# Altium PCB nf10_addon.PcbDoc
Units mm, origin at the board's own origin, x right, y up, seen from the top; angles counter-clockwise.
Board outline 53.47 x 43.69 mm, 2 copper layers (Top Layer, Bottom Layer); 22 components, 36 nets, 127 pads, 24 vias.
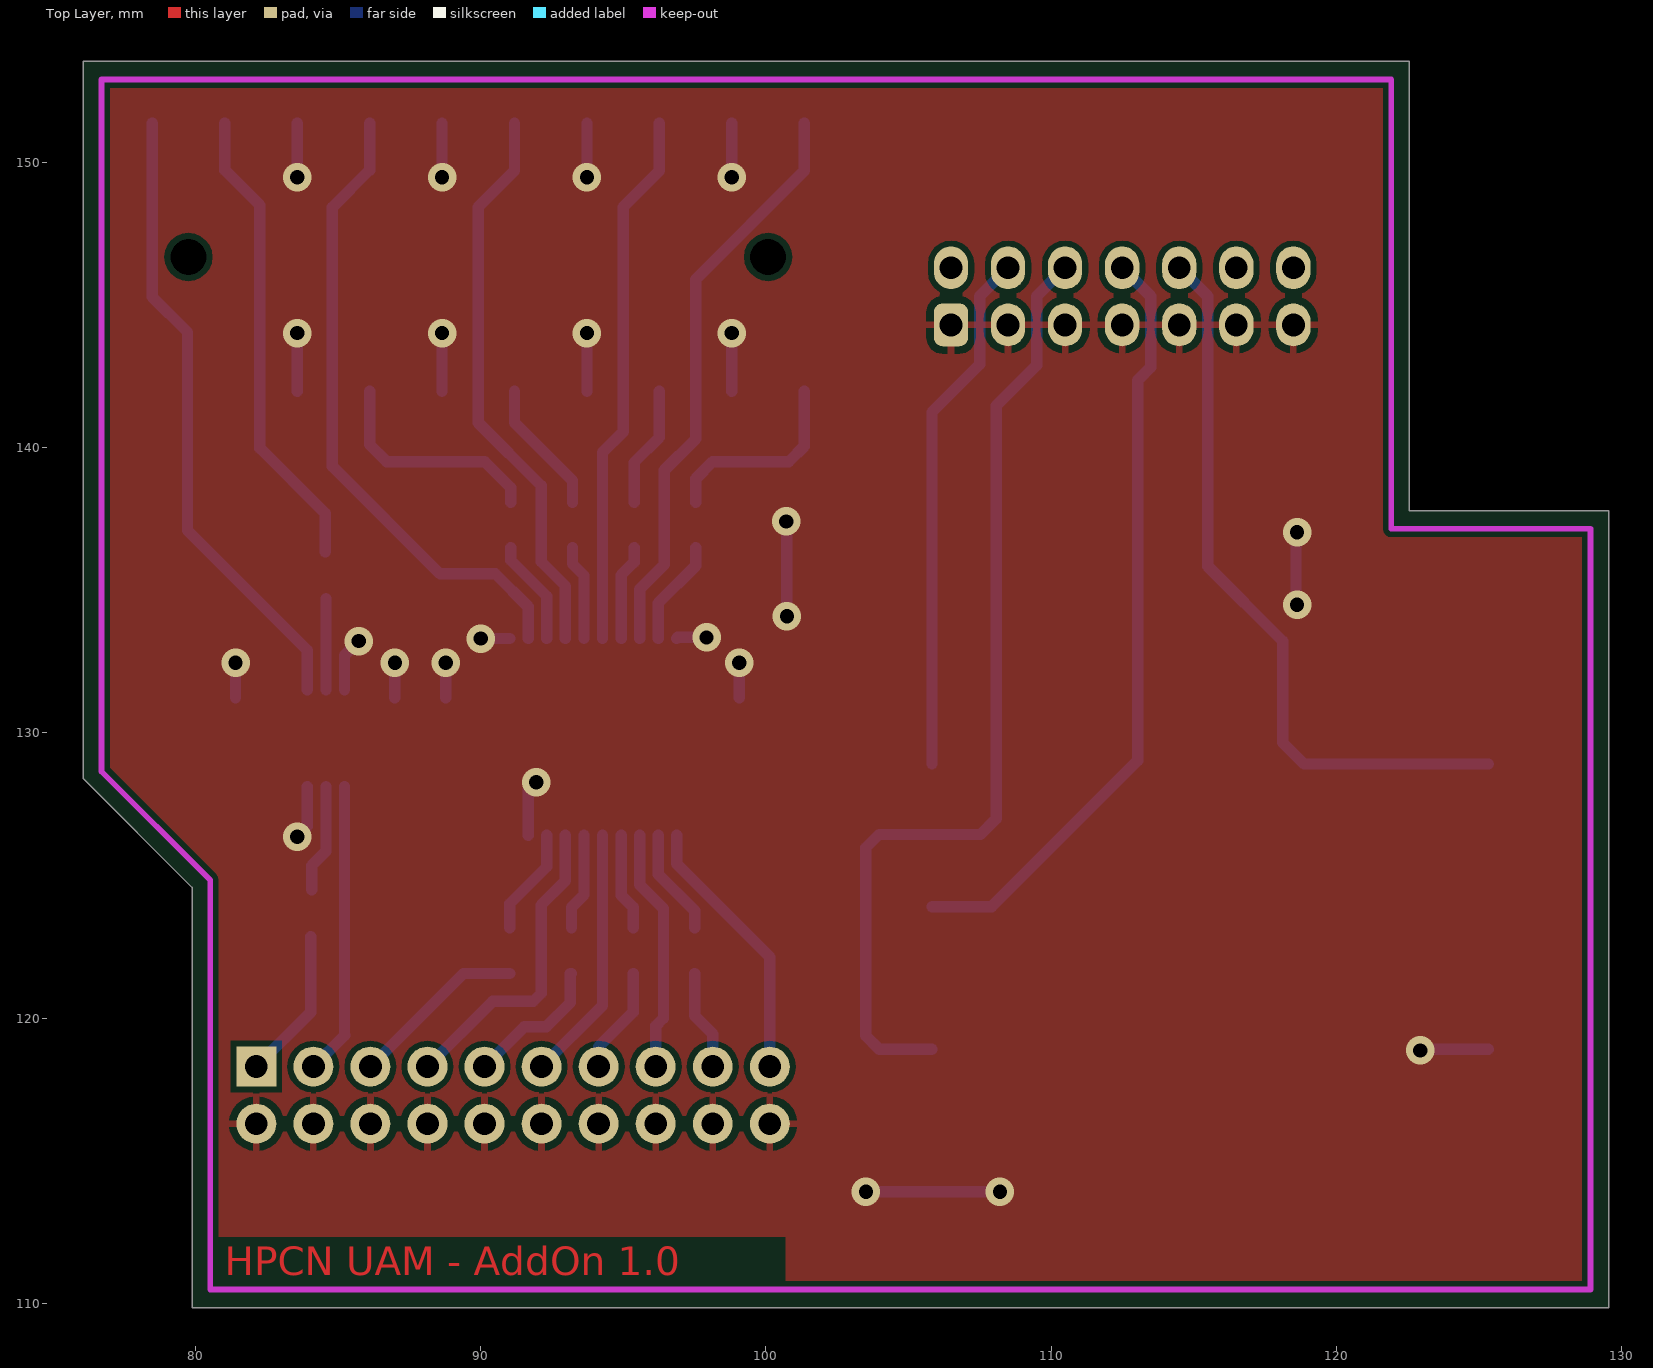
[diagram p0: Top Layer view]
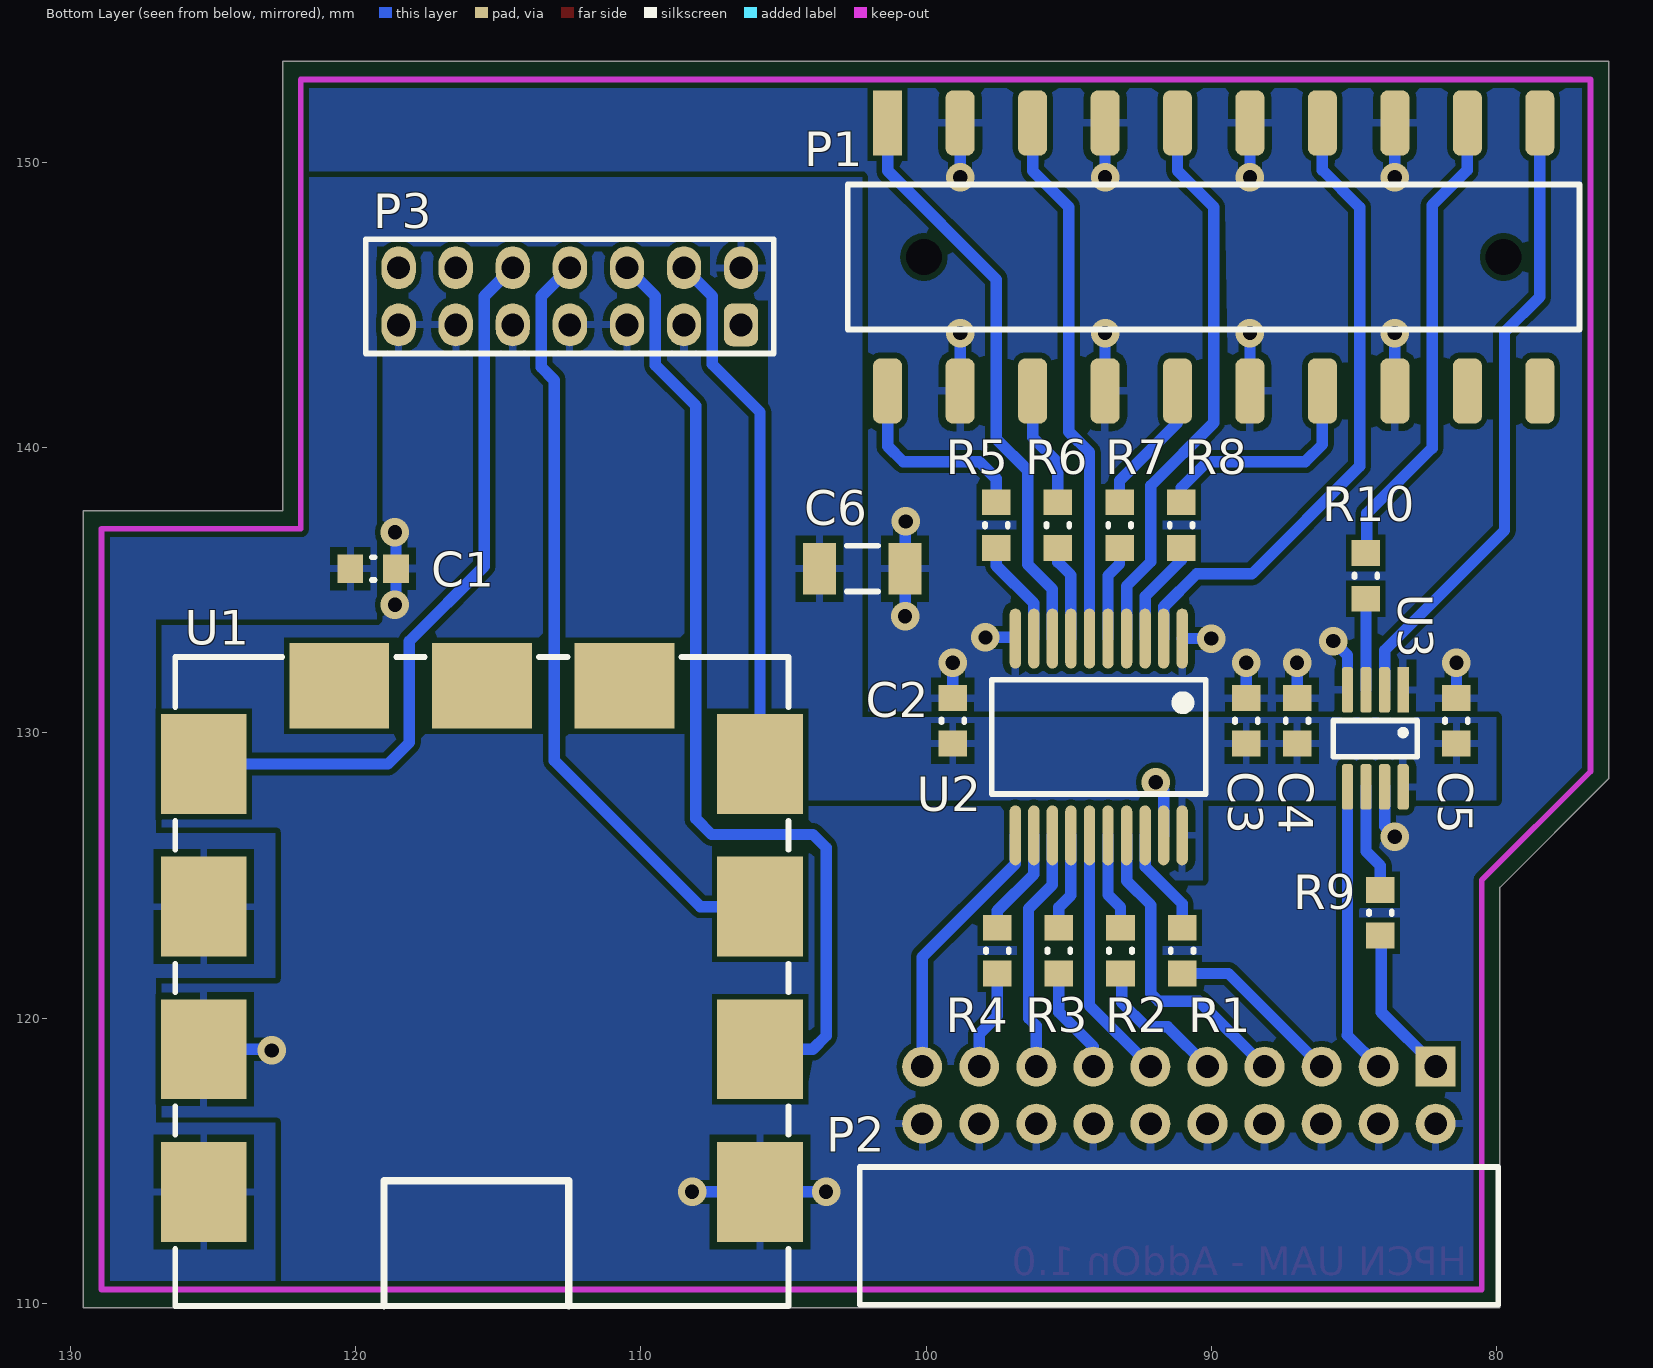
[diagram p1: Bottom Layer view, seen from below]

## Layer stack, top to bottom
Top Solder: solder mask 0.0102, Solder Resist, Dk 3.5
Top Layer: signal copper 0.0356
Dielectric 1: dielectric 0.32, FR-4, Dk 4.8
Bottom Layer: signal copper 0.0356
Bottom Solder: solder mask 0.0102, Solder Resist, Dk 3.5

## Board outline
79.883,124.587 76.073,128.397 76.073,153.543 122.555,153.543 122.555,137.795 129.54,137.795 129.54,109.855 79.883,109.855

## Design rules (kind name [scope] priority, off if disabled: settings)
Clearance [All] p1: gap=0.2 ignorepadtopadclearanceinfootprint=FALSE except(0: Arc-Hole Track-Hole SMDPad-Hole THPad-Hole Via-Hole Fill-Hole Poly-Hole Region-Hole Text-Hole)
MinimumSolderMaskSliver [All] p1: minsoldermaskwidth=0.099
PolygonConnect PolygonConnect_Pad [isPad vs isPolygon] p1: connectstyle=Relief reliefconductorwidth=0.254 reliefentries=4 polygonreliefangle="90 Angle" airgapwidth=0.254
PolygonConnect PolygonConnect_Via [isVia vs isPolygon] p2: connectstyle=Direct reliefconductorwidth=0.254 reliefentries=4 polygonreliefangle="90 Angle" airgapwidth=0.254
RoomDefinition nf10_addon [InComponentClass('nf10_addon')] p1: confinementstyle=ConfineIn formatcopy=TRUE lockcomponents=FALSE outline 75.184,109.474 129.921,109.474 129.921,154.051 75.184,154.051
RoutingVias [All] p1: holewidth=0.5 width=1 viastyle="Through Hole" minholewidth=0.5 minwidth=0.9 maxholewidth=0.711 maxwidth=1.27
SilkToSilkClearance [All] p1: silktosilkclearance=0.1
SilkToSolderMaskClearance [IsPad] p1: minsilkscreentomaskgap=0.1 clearancetoexposedcopper=TRUE
SolderMaskExpansion [All] p1: expansion=0.075
Width [All] p1: maxlimit=1 minlimit=0.2 preferedwidth=0.4
27 further rules are at their usual default settings.

## Components (designator, comment, footprint, x,y, rotation, side; value= is the part's Value field where it differs from the comment)
C1 "Cap" CAPC0603(1608)100_N 119.38,135.763 r0 bottom value="100 nF"
C2 "Cap" CAPC0603(1608)100_N 99.06,130.429 r270 bottom value="1 nF"
C3 "Cap" CAPC0603(1608)100_N 88.773,130.429 r270 bottom value="100 nF"
C4 "Cap" CAPC0603(1608)100_N 86.995,130.429 r270 bottom value="1 nF"
C5 "Cap" CAPC0603(1608)100_N 81.407,130.429 r270 bottom value="100 nF"
C6 "Cap" CAPC1206(3216)100_N 102.235,135.763 r0 bottom value="10 uF"
P1 "SSM-110-x-DV-LC" SSM-110-X-DV-LC 101.346,151.384 r90 bottom locked
P2 "LTMM-110-02-x-D-RA" LTMM-110-02-X-D-RA 82.135,118.304 r270 bottom
P3 "PTF-107-xx-L-D" PTF-107-XX-L-D 106.488,144.306 r270 bottom
R1 "Res3" RESC0603(1608)_N 91.025,122.368 r270 bottom value=100R
R2 "Res3" RESC0603(1608)_N 93.184,122.368 r270 bottom value=100R
R3 "Res3" RESC0603(1608)_N 95.343,122.368 r270 bottom value=100R
R4 "Res3" RESC0603(1608)_N 97.502,122.368 r270 bottom value=100R
R5 "Res3" RESC0603(1608)_N 97.536,137.287 r90 bottom value=100R
R6 "Res3" RESC0603(1608)_N 95.377,137.287 r90 bottom value=100R
R7 "Res3" RESC0603(1608)_N 93.218,137.287 r90 bottom value=100R
R8 "Res3" RESC0603(1608)_N 91.059,137.287 r90 bottom value=100R
R9 "Res3" RESC0603(1608)_N 84.074,123.698 r270 bottom value=100R
R10 "Res3" RESC0603(1608)_N 84.582,135.509 r90 bottom value=100R
U1 "JTAG-SMT2" JTAG-SMT2 115.57,121.412 r0 bottom
U2 "SN74LVC244ADB" DB020_N 93.946,129.861 r270 bottom
U3 "SN74LVC2G241DCTR" DCT08_N 83.278,131.512 r270 bottom

## Footprints (in the part's own frame and the unit in brackets; to place one, negate y for a bottom-side part, rotate by r counter-clockwise, add the part's x,y. Pads: shape width x height; smd on the part's side, far side on the other; paste and mask are expansions set on the pad)
CAPC0603(1608)100_N [mm] "Chip Capacitor, Body 1.6x0.8mm, Height 1.0mm, IPC Medium Density"
  rect 0.9x1 smd: 1(-0.8,0) 2(0.8,0)
  silkscreen extent -0.05,-0.4 0.05,0.4, body extent -0.87,-0.48 0.88,0.47, height 1
CAPC1206(3216)100_N [mm] "Chip Capacitor, Body 3.2x1.6mm, Height 1mm, IPC Medium Density"
  rect 1.15x1.8 smd: 1(-1.5,0) 2(1.5,0)
  silkscreen extent -0.55,-0.8 0.55,0.8, body extent -1.7,-0.9 1.7,0.9, height 1
DB020_N [mm] "SOP, 20-Leads, Body 7.2x5.3mm, Pitch 0.65mm, IPC Medium Density"
  oval 2.1x0.4 smd: 1(-3.45,2.925) 2(-3.45,2.275) 3(-3.45,1.625) 4(-3.45,0.975) 5(-3.45,0.325) 6(-3.45,-0.325) 7(-3.45,-0.975) 8(-3.45,-1.625) 9(-3.45,-2.275) 10(-3.45,-2.925) 11(3.45,-2.925) 12(3.45,-2.275) 13(3.45,-1.625) 14(3.45,-0.975) 15(3.45,-0.325) 16(3.45,0.325) 17(3.45,0.975) 18(3.45,1.625) 19(3.45,2.275) 20(3.45,2.925)
  silkscreen extent -2,-3.75 2,3.75, body extent -2.7,-3.75 2.7,3.75, height 2
DCT08_N [mm]
  rect 1.6x0.4 smd: 1(0,0)
  rrect50% 1.6x0.4 smd: 2(0,-0.65) 3(0,-1.3) 4(0,-1.95) 5(3.4,-1.95) 6(3.4,-1.3) 7(3.4,-0.65) 8(3.4,0)
  silkscreen extent 1.07,-2.45 2.35,0.5
JTAG-SMT2 [mm]
  rect 3x3.5 smd: 1(-9.75,7.5) 2(-9.75,2.5) 3(-9.75,-2.5) 4(-9.75,-7.5) 8(9.75,-7.5) 9(9.75,-2.5) 10(9.75,2.5) 11(9.75,7.5)
  rect 3.5x3 smd: 5(-5,-10.25) 6(0,-10.25) 7(5,-10.25)
  silkscreen extent -10.75,-11.25 10.75,11.5
LTMM-110-02-X-D-RA [mm]
  rect 1.4x1.4 hole 0.8: 1(0,0)
  round 1.4 hole 0.8: 2(2,0) 3(0,-2) 4(2,-2) 5(0,-4) 6(2,-4) 7(0,-6) 8(2,-6) 9(0,-8) 10(2,-8) 11(0,-10) 12(2,-10) 13(0,-12) 14(2,-12) 15(0,-14) 16(2,-14) 17(0,-16) 18(2,-16) 19(0,-18) 20(2,-18)
  silkscreen extent 3.52,-20.19 8.35,2.19
PTF-107-XX-L-D [mm]
  rrect50% 1.5x1.2 hole 0.8: 1(0,0)
  oval 1.5x1.2 hole 0.8: 2(-2,0) 3(0,-2) 4(-2,-2) 5(0,-4) 6(-2,-4) 7(0,-6) 8(-2,-6) 9(0,-8) 10(-2,-8) 11(0,-10) 12(-2,-10) 13(0,-12) 14(-2,-12)
  silkscreen extent -3,-13.15 1,1.15
RESC0603(1608)_N [mm] "Chip Resistor, Body 1.6x0.8mm, IPC Medium Density"
  rect 0.9x1 smd: 1(-0.8,0) 2(0.8,0)
  silkscreen extent -0.05,-0.4 0.05,0.4, body extent -0.85,-0.47 0.85,0.47, height 0.6
SSM-110-X-DV-LC [mil]
  rect 90x40 smd: 1(0,0)
  rrect50% 90x40 smd: 2(-370,0) 3(0,-100) 4(-370,-100) 5(0,-200) 6(-370,-200) 7(0,-300) 8(-370,-300) 9(0,-400) 10(-370,-400) 11(0,-500) 12(-370,-500) 13(0,-600) 14(-370,-600) 15(0,-700) 16(-370,-700) 17(0,-800) 18(-370,-800) 19(0,-900) 20(-370,-900)
  round 0 hole 50 unplated: LC1(-185,-50) LC2(-185,-850)
  silkscreen extent -285,-955 -85,55

## Part data
C1 C2 C3 C4 C5 C6: "Capacitor", LatestRevisionDate=17-Jul-2002, LatestRevisionNote="Re-released for DXP Platform.", PackageDescription="Radial Cap, Thru-Hole; 2 Leads; 0.3 in Pin Spacing", PackageReference=RAD-0.3, Published=8-Jun-2000, Publisher="Altium Limited"
P1: "Samtec SSM-110-x-DV-LC", LatestRevisionDate=17-Jul-2002, LatestRevisionNote="Re-released for DXP Platform.", Publisher="Altium Limited"
P2: "Samtec LTMM-110-02-x-D-RA", LatestRevisionDate=17-Jul-2002, LatestRevisionNote="Re-released for DXP Platform.", Publisher="Altium Limited"
P3: "Samtec PTF-107-xx-L-D", LatestRevisionDate=17-Jul-2002, LatestRevisionNote="Re-released for DXP Platform.", Publisher="Altium Limited"
R1 R2 R3 R4 R5 R6 R7 R8 R9 R10: "Resistor", LatestRevisionDate=29-May-2009, LatestRevisionNote="IPC-7351 Footprint Added.", PackageDescription="Chip Resistor", PackageReference=J1-0603, Published=8-Jun-2000, Publisher="Altium Limited"
U1: library part JTAG_SMT2
U2: "Octal Buffer/Driver with 3-State Outputs", Code_IPC=SOP65P780-20, Code_JEDEC=MO-150-AE, ComponentLink1Description="Manufacturer Link", ComponentLink1URL=http://www.ti.com/, ComponentLink2Description=Datasheet, ComponentLink2URL=http://www-s.ti.com/sc/ds/sn74lvc244a.pdf, DatasheetVersion=Apr-1999, LatestRevisionDate=16-Oct-2006, LatestRevisionNote="IPC-7351 Footprint Added.", PackageDescription="20-Pin Plastic Small Outline Package 0.65 mm Pitch", PackageReference=DB020, PackageVersion=May-1999, Published=8-Jun-2000, Publisher="Altium Limited"
U3: "Quadruple Bus Buffer Gate with 3- State Outputs", Code_JEDEC=MO-092-AB, ComponentLink1Description="Manufacturer Link", ComponentLink1URL=http://www.ti.com/, ComponentLink2Description=Datasheet, ComponentLink2URL=http://www-s.ti.com/sc/ds/sn54abt125.pdf, DatasheetVersion=May-1997, LatestRevisionDate=06-Jun-2005, LatestRevisionNote="Stylized 3D Model Added.", PackageDescription="DFP; 14 Leads; Body 9.9 x 6.6 mm (LxW max); Pitch 1.27 mm", PackageReference=W014, PackageVersion=Jan-1995, Published=8-Jun-2000, Publisher="Altium Limited"

## Via types
v1: diameter 1, hole 0.5, Top Layer to Bottom Layer, tented both sides, 24 vias

## Nets (pads, with @x,y where several pads share a name; then routed paths per layer and width w, separated by ;. In a path a pad name is that pad's centre, name@x,y a point inside that pad or via, vN(x,y) a via of type N, cw(c..) or ccw(c..) an arc to the next point about the centre after c; other vN are vias at no path point)
GND: C1.1 C2.1 C3.1 C4.1 C5.1 C6.1 P1.3 P1.4 P1.7 P1.8 P1.11 P1.12 P1.15 P1.16 P2.2 P2.4 P2.6 P2.8 P2.10 P2.12 P2.14 P2.16 P2.18 P2.20 P3.1 P3.3 P3.5 P3.7 P3.9 P3.11 P3.13 U1.1 U1.10 U2.1 U2.10 U2.19 U3.1 U3.4 U3.7 | length 41.4
  Bottom Layer w0.4: C5.1 v1(81.407,132.461) ; v1(83.566,126.365) 83.928,126.727 U3.7 ; P1.16 v1(83.566,144.018) ; v1(83.566,149.479) P1.15 ; U3.4 85.228,132.726 v1(85.725,133.223) ; C4.1 v1(86.995,132.461) ; P1.12 v1(88.646,144.018) ; v1(88.646,149.479) P1.11 ; C3.1 v1(88.773,132.461) ; v1(90.004,133.311) U2.1 ; U2.19 91.671,127.993 v1(91.948,128.27) ; P1.8 v1(93.726,144.018) ; v1(93.726,149.479) P1.7 ; U2.10 96.91,133.35 v1(97.917,133.35) ; P1.4 v1(98.806,144.018) ; v1(98.806,149.479) P1.3 ; C2.1 v1(99.06,132.461) ; v1(100.711,137.414) 100.735,137.39 C6.1 v1(100.735,134.088) ; v1(103.505,113.919) 103.512,113.912 U1.1 108.197,113.912 v1(108.204,113.919) ; v1(118.618,134.493) 118.58,134.531 C1.1 118.58,136.995 v1(118.618,137.033) ; v1@123.063,118.872 123.103,118.912 U1.10
  other v1: 122.936,118.872
IN0: P2.3 U3.5 | length 10.3
  Bottom Layer w0.4: P2.3 85.231,119.399 85.228,119.402 U3.5
IN1: P2.7 U2.17 | length 10.9
  Bottom Layer w0.4: P2.7 90.421,120.59 91.838,120.59 92.117,120.869 92.117,123.968 92.971,124.822 U2.17
IN2: P2.11 U2.15 | length 9
  Bottom Layer w0.4: P2.11 94.271,120.44 U2.15
IN3: P2.15 U2.13 | length 8.6
  Bottom Layer w0.4: U2.13 95.571,124.68 96.41,123.841 96.41,120.006 96.135,119.731 P2.15
IN4: P2.19 U2.11 | length 9.5
  Bottom Layer w0.4: U2.11 96.871,125.412 100.135,122.148 P2.19
MICTOR01: P1.19 U3.2 | length 22.1
  Bottom Layer w0.4: P1.19 78.486,145.288 79.722,144.052 79.722,137.1 83.928,132.894 U3.2
MICTOR02: P1.17 R10.2 | length 16.5
  Bottom Layer w0.4: P1.17 81.026,149.733 82.262,148.497 82.262,139.988 84.548,137.702 R10.2@84.548,136.343
MICTOR03: P1.13 U2.2 | length 22.6
  Bottom Layer w0.4: P1.13 86.106,149.733 84.802,148.429 84.802,139.353 88.578,135.577 90.516,135.577 91.671,134.422 U2.2
MICTOR04: P1.9 U2.4 | length 19.9
  Bottom Layer w0.4: P1.9 91.186,149.707 89.916,148.437 89.916,140.876 92.117,138.675 92.117,136.008 92.971,135.154 U2.4
MICTOR05: P1.5 U2.6 | length 18.9
  Bottom Layer w0.4: U2.6 94.271,139.838 94.996,140.563 94.996,148.437 96.266,149.707 P1.5
MICTOR06: P1.1 U2.8 | length 20.5
  Bottom Layer w0.4: U2.8 95.571,135.042 96.435,135.906 96.435,139.208 97.536,140.309 97.536,145.897 101.346,149.707 P1.1
MICTOR07: P1.2 R5.2 | length 7
  Bottom Layer w0.4: R5.2 97.536,138.912 98.137,139.513 100.804,139.513 101.346,140.055 P1.2
MICTOR08: P1.6 R6.2 | length 4.3
  Bottom Layer w0.4: R6.2 95.377,139.479 96.266,140.368 P1.6
MICTOR09: P1.14 R8.2 | length 8
  Bottom Layer w0.4: P1.14 86.106,140.114 86.707,139.513 90.136,139.513 91.059,138.59 R8.2
MICTOR10: P1.10 R7.2 | length 4.7
  Bottom Layer w0.4: P1.10 91.186,140.876 93.218,138.844 R7.2
NetR1_1: R1.1 U2.18 | length 3.8
  Bottom Layer w0.4: R1.1 91.025,124.019 92.321,125.315 U2.18
NetR2_1: R2.1 U2.16 | length 3.4
  Bottom Layer w0.4: R2.1 93.184,123.892 93.621,124.329 U2.16
NetR3_1: R3.1 U2.14 | length 3.4
  Bottom Layer w0.4: U2.14 94.921,124.314 95.343,123.892 R3.1
NetR4_1: R4.1 U2.12 | length 3.8
  Bottom Layer w0.4: U2.12 96.221,125.046 97.502,123.765 R4.1
NetR5_1: R5.1 U2.9 | length 3.7
  Bottom Layer w0.4: U2.9 96.221,134.549 97.536,135.864 R5.1
NetR6_1: R6.1 U2.7 | length 3.4
  Bottom Layer w0.4: U2.7 94.921,135.535 95.377,135.991 R6.1
NetR7_1: R7.1 U2.5 | length 3.3
  Bottom Layer w0.4: R7.1 93.218,135.923 93.621,135.52 U2.5
NetR8_1: R8.1 U2.3 | length 3.7
  Bottom Layer w0.4: R8.1 91.059,136.05 92.321,134.788 U2.3
NetR9_1: R9.1 U3.6 | length 3.8
  Bottom Layer w0.4: R9.1 84.074,125.349 84.578,125.853 U3.6
NetR10_1: R10.1 U3.3 | length 3.2
  Bottom Layer w0.4: U3.3 R10.1@84.578,134.705
OUT0: P2.1 R9.2 | length 5.3
  Bottom Layer w0.4: P2.1 84.04,120.209 R9.2@84.04,122.864
OUT1: P2.5 R1.2 | length 6.2
  Bottom Layer w0.4: P2.5 89.399,121.568 R1.2
OUT2: P2.9 R2.2 | length 5
  Bottom Layer w0.4: P2.9 91.532,119.701 92.295,119.701 93.145,120.551 93.145,121.568 R2.2
OUT3: P2.13 R3.2 | length 3.8
  Bottom Layer w0.4: P2.13 94.135,119.001 95.343,120.209 R3.2
OUT4: P2.17 R4.2 | length 3.5
  Bottom Layer w0.4: R4.2 97.502,120.082 98.135,119.449 P2.17
TCK: P3.6 U1.2 | length 34.4
  Bottom Layer w0.4: U1.2 103.973,118.912 103.505,119.38 103.505,125.984 103.962,126.441 107.518,126.441 108.077,127 108.077,141.478 109.488,142.889 109.488,145.306 P3.6
TDI: P3.10 U1.8 | length 25.7
  Bottom Layer w0.4: P3.10 115.488,145.306 115.488,135.845 118.11,133.223 118.11,129.667 118.865,128.912 U1.8
TDO: P3.8 U1.3 | length 27.2
  Bottom Layer w0.4: U1.3 107.91,123.912 113.03,129.032 113.03,142.367 113.488,142.825 113.488,145.306 P3.8
TMS: P3.4 U1.4 | length 18.5
  Bottom Layer w0.4: U1.4 105.82,141.253 107.488,142.921 107.488,145.306 P3.4
VCC: C1.2 C2.2 C3.2 C4.2 C5.2 C6.2 P3.2 U1.9 U1.11 U2.20 U3.8
pads on no net: P1.18 P1.20 P1.LC1 P1.LC2 P3.12 P3.14 U1.5 U1.6 U1.7

## Polygon pours and split planes (outlines as drawn)
GND on Bottom Layer "Bottom Layer-No Net" (solid, pour order 3): 76.708,152.908 76.708,128.651 80.518,124.841 80.518,110.49 128.905,110.49 128.905,137.16 121.92,137.16 121.92,152.908
VCC on Bottom Layer "Bottom Layer-No Net" (solid, pour order 2): 80.01,127.635 90.297,127.635 90.297,124.841 91.694,124.841 91.694,127.635 104.267,127.635 104.267,130.683 105.537,130.683 105.537,145.161 107.569,145.161 107.569,147.066 119.253,147.066 119.253,133.985 127,133.985 127,126.492 122.809,126.492 122.809,121.412 127,121.412 127,116.332 122.809,116.332 122.809,110.49 128.905,110.49 128.905,137.16 121.92,137.16 121.92,149.479 102.235,149.479 102.235,130.556 80.01,130.556
GND on Top Layer "Bottom Layer-No Net" (solid, pour order 4): 76.708,152.908 76.708,128.651 80.518,124.841 80.518,110.49 128.905,110.49 128.905,137.033 128.905,137.16 121.92,137.16 121.92,152.908 76.708,152.908

## Keep-outs
Keep-Out Layer:
  lines w0.2: 76.708,128.651 80.518,124.841 80.518,119.793 80.518,110.49 128.905,110.49 128.905,120.301 128.905,137.16 121.92,137.16 121.92,152.908 76.708,152.908 76.708,128.651

## Other copper
Top Layer:
  text "HPCN UAM - AddOn 1.0" at 81.026,110.998 h1

## Silkscreen, mask and mechanical layers (free items; w line width, h text height)
Top Solder:
  text "HPCN UAM - AddOn 1.0" at 81.026,110.998 h1
Mechanical 2:
  the board outline again, w0.2